# Altium PCB CompressorPCB.PcbDoc
Units mil, origin at the board's own origin, x right, y up, seen from the top; angles counter-clockwise.
Board outline 925.2 x 4665.35 mil, 2 copper layers (Top Layer, Bottom Layer); 60 components, 42 nets, 185 pads, 41 vias.
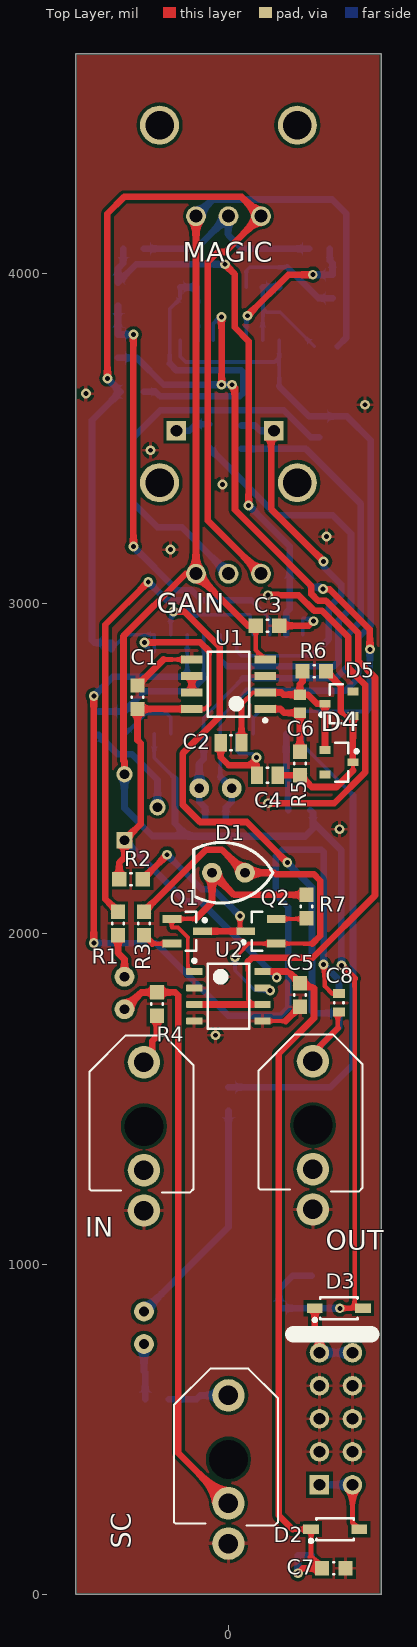
[diagram p0: Top Layer view]
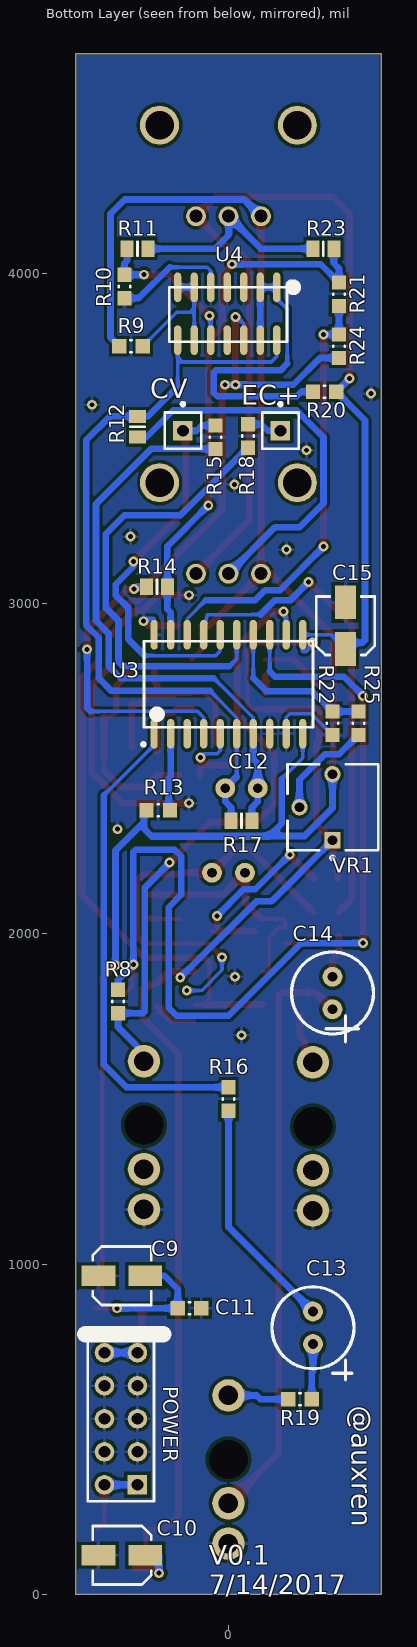
[diagram p1: Bottom Layer view, seen from below]

## Layer stack, top to bottom
Top Solder: solder mask 0.4, Solder Resist, Dk 3.5
Top Layer: signal copper 1.4
Dielectric 1: dielectric 12.6, FR-4, Dk 4.8
Bottom Layer: signal copper 1.4
Bottom Solder: solder mask 0.4, Solder Resist, Dk 3.5

## Board outline
-462.6,0 -462.6,4665.35 462.6,4665.35 462.6,0

## Design rules (kind name [scope] priority, off if disabled: settings)
BoardOutlineClearance [All] p1: gap=5 ignorepadtopadclearanceinfootprint=FALSE
Clearance [All] p1: gap=10 ignorepadtopadclearanceinfootprint=FALSE except(0: Arc-Hole Track-Hole SMDPad-Hole THPad-Hole Via-Hole Fill-Hole Poly-Hole Region-Hole Text-Hole)
PlaneConnect [All] p1: planeconnectstyle=Relief reliefexpansion=20 reliefentries=4 reliefconductorwidth=10 reliefairgap=20
PolygonConnect [All] p1: connectstyle=Relief reliefconductorwidth=10 reliefentries=4 polygonreliefangle="90 Angle" airgapwidth=10
RoutingVias [All] p1: holewidth=15 width=30 viastyle="Through Hole" minholewidth=15 minwidth=30 maxholewidth=28 maxwidth=50
SMDNeckDown [All] p1: percent=50.000
SolderMaskExpansion [All] p1: expansion=4
Width [All] p1: maxlimit=50 minlimit=10 preferedwidth=20
29 further rules are at their usual default settings.

## Components (designator, comment, footprint, x,y, rotation, side; value= is the part's Value field where it differs from the comment)
C1 "100nF" CAPC0603(1608)100_M -275.59,2716.54 r90 top
C2 "1uF" CAPC0805(2012)155_L 7.87,2578.74 r0 top
C3 "100nF" CAPC0603(1608)100_M 118.11,2933.07 r0 top
C4 "10uF" CAPC0805(2012)155_L 118.11,2480.32 r0 top
C5 "100nF" CAPC0603(1608)100_M 216.54,1814.96 r270 top
C6 "47nF" 1608[0603] 216.54,2696.85 r90 top
C7 "100nF" CAPC0603(1608)100_M 318.9,78.74 r0 top
C8 "47pF" CAPC0603(1608)100_L 334.65,1791.34 r270 top
C9 "22uF" NIC-CAPA2-4X5.8_V 322.83,964.57 r180 bottom
C10 "22uF" NIC-CAPA2-4X5.8_V 322.83,118.11 r0 bottom
C11 "100nF" CAPC0603(1608)100_M 118.11,866.14 r0 bottom
C12 "100nF" "WIMA Poly Cap" -39.37,2440.94 r0 bottom
C13 "47uF Bi-Polar" "Nichicon Bi-Polar 6.3mm" -255.91,807.09 r270 bottom value=47uF
C14 "47uF Bi-Polar" "Nichicon Bi-Polar 6.3mm" -314.96,1820.87 r270 bottom value=47uF
C15 "22uF" NIC-CAPA2-4X5.8_V -354.33,2933.07 r90 bottom
CV "Socket" PIN1 137.8,3523.62 r180 bottom
D1 "Red/Green LED" "Red/Green LED" 0,2185.04 r0 top
D2 "1N5819HW-7-F" DIOD-SOD-123-2_V 322.83,196.85 r180 top
D3 "1N5819HW-7-F" DIOD-SOD-123-2_V 334.65,866.14 r180 top
D4 "MBD101" SOT23_L 334.65,2519.69 r0 top
D5 "MBD101" SOT23_L 334.65,2696.85 r180 top
EC+ "Socket" PIN1 -157.48,3523.62 r180 bottom
GAIN "10k" SonGueiPot 0,3366.14 r0 top
IN "Thonkicon jack" "Thonkiconn Pot PJ301M" -255.91,1417.32 r0 top
MAGIC "100k" SonGueiPot 0,4448.82 r0 top
OUT "Thonkicon jack" "Thonkiconn Pot PJ301M" 255.91,1420.47 r0 top
POWER "Header 5X2" HDR2X5 275.59,331.5 r90 bottom (schematic designator P1)
Q1 "MMBT3906LT1G" SOT23_M -125,2007.87 r0 top
Q2 "MMBT3906LT1G" SOT23_M 98.43,2007.87 r180 top
R1 "20k" RESC0603(1608)_M -334.65,2031.5 r270 top
R2 "4.7k" RESC0603(1608)_M -295.28,2165.35 r0 top
R3 "10k" RESC0603(1608)_M -255.91,2031.5 r90 top
R4 "100k" RESC0603(1608)_M -216.54,1787.4 r270 top
R5 "200" RESC0603(1608)_M 216.54,2515.75 r90 top
R6 "2M" RESC0603(1608)_M 259.84,2795.28 r180 top
R7 "10k" RESC0603(1608)_M 236.22,2082.68 r90 top
R8 "20k" RESC0603(1608)_M 334.65,1795.28 r90 bottom
R9 "1.6M" RESC0603(1608)_M 295.28,3779.53 r180 bottom
R10 "12k" RESC0603(1608)_M 314.96,3960.63 r90 bottom
R11 "806k" 6-0805_L 275.59,4074.8 r0 bottom
R12 "806k" 6-0805_L 275.59,3535.43 r90 bottom
R13 "2M" RESC0603(1608)_M 212.76,2374.17 r180 bottom
R14 "6.04k" 6-0805_L 216.54,3051.18 r0 bottom
R15 "0" RESC0603(1608)_M 39.37,3503.94 r270 bottom
R16 "28k" RESC0603(1608)_M 0,1500 r90 bottom
R17 "6.04k" 6-0805_L -39.37,2342.52 r0 bottom
R18 "100k" RESC0603(1608)_M -59.06,3507.87 r270 bottom
R19 "100k" RESC0603(1608)_M -216.54,590.55 r0 bottom
R20 "1.6M" RESC0603(1608)_M -291.34,3641.73 r180 bottom
R21 "806k" 6-0805_L -287.4,4074.8 r0 bottom
R22 "51" RESC0603(1608)_M -314.96,2637.8 r270 bottom
R23 "12k" RESC0603(1608)_M -334.65,3937.01 r90 bottom
R24 "12k" RESC0603(1608)_M -334.65,3779.53 r90 bottom
R25 "300k" RESC0603(1608)_M -393.7,2637.8 r270 bottom
SC "Thonkicon jack" "Thonkiconn Pot PJ301M" 0,408.66 r0 top
U1 "LF353M" D0008A_M 0,2755.91 r180 top
U2 "LM393DR" D0008A_L 0,1811.02 r0 top
U3 "THAT4301" SOIC20THAT 0,2755.91 r90 bottom
U4 "THAT340 Transistor Array" SOIC14 78.74,3877.95 r270 bottom
VR1 "50k Trim" BOUR-3362P -316.34,2383.46 r90 bottom

## Footprints (in the part's own frame and the unit in brackets; to place one, negate y for a bottom-side part, rotate by r counter-clockwise, add the part's x,y. Pads: shape width x height; smd on the part's side, far side on the other; paste and mask are expansions set on the pad)
6-0805_L [mm] "Chip Resistor, Body 2.0x1.2mm, IPC High Density"
  rect 1x1.3 smd: 1(-0.8,0) 2(0.8,0)
  silkscreen extent 0,-0.55 0,0.55, body extent -1.07,-0.7 1.07,0.7, height 0.7
1608[0603] [mm] "Chip Capacitor, Body 1.6x0.8mm, IPC High Density"
  rect 0.8x0.9 smd: 1(-0.7,0) 2(0.7,0)
  body extent -0.87,-0.48 0.87,0.48, height 1.3
BOUR-3362P [mm] "THD, 3-Leads, Body 6.6x6.99mm, Pitch 2.54mm"
  rect 1.25x1.25 hole 0.75: 1(-2.54,0.035)
  round 1.25 hole 0.75: 2(0,2.575) 3(2.54,0.035)
  silkscreen extent -4.02,-3.5 3.3,3.5, body extent -3.3,-3.49 3.3,3.49, height 4.95
CAPC0603(1608)100_L [mm] "Chip Capacitor, Body 1.6x0.8mm, Height 1.0mm, IPC High Density"
  rect 0.7x0.9 smd: 1(-0.7,0) 2(0.7,0)
  silkscreen extent -0.05,-0.35 0.05,0.35, body extent -0.87,-0.47 0.88,0.48, height 1
CAPC0603(1608)100_M [mm] "Chip Capacitor, Body 1.6x0.8mm, Height 1.0mm, IPC Low Density"
  rect 1.1x1.1 smd: 1(-0.9,0) 2(0.9,0)
  silkscreen extent -0.05,-0.45 0.05,0.45, body extent -0.87,-0.47 0.88,0.48, height 1
CAPC0805(2012)155_L [mm] "Chip Capacitor, Body 2.0x1.2mm, Height 1.55mm, IPC High Density"
  rect 0.95x1.35 smd: 1(-0.8,0) 2(0.8,0)
  silkscreen extent -0.05,-0.57 0.05,0.57, body extent -1.1,-0.72 1.1,0.72, height 1.55
D0008A_L [mm] "SOIC, 8-Leads, Body 5x4mm, Pitch 1.27mm, IPC High Density"
  rrect18% 1.25x0.55 smd: 1(-2.625,1.905) 2(-2.625,0.635) 3(-2.625,-0.635) 4(-2.625,-1.905) 5(2.625,-1.905) 6(2.625,-0.635) 7(2.625,0.635) 8(2.625,1.905)
  silkscreen extent -2.75,-2.5 1.6,2.85, body extent -3,-2.45 3,2.45, height 1.63
D0008A_M [mm] "SOIC, 8-Leads, Body 5x4mm, Pitch 1.27mm, IPC Low Density"
  rrect15% 1.65x0.65 smd: 1(-2.825,1.905) 2(-2.825,0.635) 3(-2.825,-0.635) 4(-2.825,-1.905) 5(2.825,-1.905) 6(2.825,-0.635) 7(2.825,0.635) 8(2.825,1.905)
  silkscreen extent -2.95,-2.5 1.6,2.9, body extent -3,-2.45 3,2.45, height 1.63
DIOD-SOD-123-2_V [mm] "SOD-123, 2-Leads, Body 2.85x1.7mm (max), Pitch 3.7mm"
  rect 1.2x0.7 smd: 1(-1.85,0) 2(1.85,0)
  silkscreen extent -1.43,-0.85 1.97,1.02, body extent -1.42,-0.85 1.43,0.85, height 1.45
HDR2X5 [mm] "Connector; Header; 5x2 Position"
  rect 1.5x1.5 hole 0.9: 1(0,0)
  round 1.5 hole 0.9: 2(0,2.54) 3(2.54,0) 4(2.54,2.54) 5(5.08,0) 6(5.08,2.54) 7(7.62,0) 8(7.62,2.54) 9(10.16,0) 10(10.16,2.54)
  silkscreen extent -1.27,-1.27 11.43,3.81
NIC-CAPA2-4X5.8_V [mm] "Aluminum Electrolytic Capacitor, Diameter 4mm, Height 6.1mm, Pitch 3.6mm"
  rect 2.6x1.6 smd: 1(-1.8,0) 2(1.8,0)
  silkscreen extent -2.25,-2.25 2.25,2.25, body extent -2,-2 2,2, height 6.1
"Nichicon Bi-Polar 6.3mm" [mil]
  round 60 hole 30: 1(-49.21,0) 2(49.21,0)
  silkscreen extent -124,-124 124,124, body extent -124,-124 124,124, height 433
PIN1 [mm] "Connector; Plug"
  rect 1.5x1.5 hole 0.9: 1(0,0)
  silkscreen extent -1.4,-1.4 1.4,2.17
"Red/Green LED" [mil]
  round 60 hole 30: 1(-50,0) 2(50,0)
  silkscreen extent -105,-92 135,92
RESC0603(1608)_M [mm] "Chip Resistor, Body 1.6x0.8mm, IPC Low Density"
  rect 1.1x1.1 smd: 1(-0.9,0) 2(0.9,0)
  silkscreen extent -0.05,-0.45 0.05,0.45, body extent -0.85,-0.47 0.85,0.47, height 0.6
SOIC14 [mil]
  oval 90x21.65 smd: 1(-80,225) 2(-80,175) 3(-80,125) 4(-80,75) 5(-80,25) 6(-80,-25) 7(-80,-75) 8(80,-75) 9(80,-25) 10(80,25) 11(80,75) 12(80,125) 13(80,175) 14(80,225)
  silkscreen extent -99,-100 85,287, body extent -80,-100 80,255, height 104
SOIC20THAT [mil]
  oval 90x21.65 smd: 1(-150,225) 2(-150,175) 3(-150,125) 4(-150,75) 5(-150,25) 6(-150,-25) 7(-150,-75) 8(-150,-125) 9(-150,-175) 10(-150,-225) 11(150,-225) 12(150,-175) 13(150,-125) 14(150,-75) 15(150,-25) 16(150,25) 17(150,75) 18(150,125) 19(150,175) 20(150,225)
  silkscreen extent -187,-256 130,262, body extent -150,-255 150,255, height 104
SonGueiPot [mm]
  round 3 hole 2.2: 0(-5.3,0) 0(5.3,0)
  round 1.524 hole 1: 1(-2.5,-7) 2(0,-7) 3(2.5,-7)
  body extent -4.88,-7.23 4.88,5.32, height 20
SOT23_L [mm] "SOT23, 3-Leads, Body 2.9x1.3mm, Pitch 0.95mm, Lead Span 2.3mm - Reverse Pinning, IPC High Density"
  rect 0.85x0.6 smd: 1(1.075,0) 2(-1.075,-0.95) 3(-1.075,0.95)
  silkscreen extent -0.3,-1.5 1.48,1.5, body extent -0.7,-1.5 0.7,1.5, height 1.1
SOT23_M [mm] "SOT23, 3-Leads, Body 2.9x1.3mm, Pitch 0.95mm, Lead Span 2.3mm - Reverse Pinning, IPC Low Density"
  rect 1.45x0.6 smd: 1(1.175,0) 2(-1.175,-0.95) 3(-1.175,0.95)
  silkscreen extent -0.1,-1.5 1.48,1.5, body extent -0.7,-1.5 0.7,1.5, height 1.1
"Thonkiconn Pot PJ301M" [mm] "PJ301 Thonkicon Jack from Thonk"
  round 1.524 hole 3: 0(0,0)
  round 2.5 hole 1.5: 1(0,-6.48) 2(0,-3.38) 3(0,4.92)
  silkscreen extent -4.19,-5.08 3.81,6.99, body extent -4.55,-10.29 4.44,5.71, height 14
"WIMA Poly Cap" [mil]
  round 60 hole 30: 1(-49.21,0) 2(49.21,0)
  body extent -100,-50 95,50, height 295

## Part data
C1 C3 C5 C7 C11: library part CMP-1035-00002-1, "CAP", Mfr=AVX, Mfr_Pn=MM035C104KCZ2A, Distributor=Mouser, Distributor_Pn=581-MM035C104KCZ2A
C2: library part CMP-1036-04882-1, "CAP 4.7uF 10V ±10% 0805 (2012 Metric) Thickness 1.55mm SMD", Case-EIA=0805, Case-Metric=2012, Mfr=Murata, Mfr_Pn=GCJ21BL81E105KA1L, Rated Voltage="10 V", Tolerance=±10%, Distributor=Mouser, Distributor_Pn=81-GCJ21BL81E105KA1L, Max Thickness="1.55 mm", Technology=SMT
C4: library part CMP-1036-04882-1, "CAP 4.7uF 10V ±10% 0805 (2012 Metric) Thickness 1.55mm SMD", Case-EIA=0805, Case-Metric=2012, Mfr=Murata, Mfr_Pn=GRM21BC71E106KE11L, Rated Voltage="10 V", Tolerance=±10%, Distributor=Mouser, Distributor_Pn=81-GRM21BC71E106KE1L, Max Thickness="1.55 mm", Technology=SMT
C6: library part CMP-1037-05002-1, "CAP 47uF 10V ±20% 1206 (3216 Metric) Thickness 1.9mm SMD", Case-EIA=1206, Case-Metric=3216, Mfr=Murata, Mfr_Pn=GRM188R71H473KA61D, Rated Voltage="10 V", Tolerance=±20%, Distributor=Mouser, Distributor_Pn=81-GRM188R71H473KA61, Max Thickness="1.9 mm", Technology=SMT
C8: library part CMP-1035-00351-1, "CAP 5.1pF 25V ±0.5pF 0603 (1608 Metric) Thickness 1mm SMD", Case-EIA=0603, Case-Metric=1608, Mfr=Yageo, Mfr_Pn=C0603FRNPO9BN470, Rated Voltage="25 V", Tolerance=±0.5pF, Distributor=Mouser, Distributor_Pn=603-C0603FRNPO9BN470, Max Thickness="1 mm", Technology=SMT, Type=NPO
C9 C10 C15: library part CMP-0687-00016-1, "Aluminum Electrolytic Capacitor, UD Series, Low Impedance, 10 uF, 25 V, + / - 20%, -55 to 105 degC, Chip Type, 4 x 5.8 mm D x L, Pb-Free, Reel", Mfr=Kemet, Mfr_Pn=EDH106M025S9BAA, Distributor=Mouser, Distributor_Pn=80-EDH106M025S9BAA
C12: library part CMP-1037-05002-1, "CAP 47uF 10V ±20% 1206 (3216 Metric) Thickness 1.9mm SMD", Case-EIA=1206, Case-Metric=3216, Mfr=WIMA, Mfr_Pn=MKS0C031000C00KSSD, Rated Voltage="10 V", Tolerance=±20%, Distributor=Mouser, Distributor_Pn=505-MKS02.1/63/10, Max Thickness="1.9 mm", Technology=SMT, Type=Poly
C13 C14: library part CMP-1037-05002-1, "CAP 47uF 10V ±20% 1206 (3216 Metric) Thickness 1.9mm SMD", Case-EIA=1206, Case-Metric=3216, Mfr=Nichicon, Mfr_Pn=UEP1E470MED, Rated Voltage="10 V", Tolerance=±20%, Distributor=Mouser, Distributor_Pn=647-UEP1E470MED, Max Thickness="1.9 mm", Technology=SMT
D1: Mfr=Lumex, Mfr_Pn=SSL-LX3044IGW, Distributor=Mouser, Distributor_Pn=696-SSL-LX3044IGW, Size=3mm
D2 D3: library part CMP-0303-00003-1, "1.0 A Surface Mount Schottky Barrier Rectifier, 40 V, -65 to 125 degC, 2-Pin SOD-123 Package, RoHS, Tape and Reel", Mfr="Diodes Inc.", Distributor=Mouser, Distributor_Pn=621-1N5819HW-F, Mfr_Pn=1N5819HW-7-F
GAIN MAGIC: library part CMP-0972-00009-1, "Trimming Potentiometer, 5K Ohm +/- 10%, -55 to 125 degC, 3-Pin 19.05 x 4.83 x 6.6 mm THD, Transparent Housing, RoHS", Manufacturer=Bourns, PartNumber=3006P-7-502ZLF, Resistance (kOhm)=5, Resistance Tolerance="+/- 10%", Temperature Range="-55 to 125 degC", ComponentLink1Description="Manufacturer URL", ComponentLink1URL=http://www.bourns.com/, ComponentLink2Description=Datasheet, ComponentLink2URL=http://www.bourns.com/data/global/pdfs/3006.pdf, ComponentLink3Description="Package Specification", ComponentLink3URL=http://www.bourns.com/data/global/pdfs/3006.pdf, DatasheetVersion=Apr-14, Distributor=Mouser, Mounting Technology="Through Hole", Number of Turns=15, PackageDescription="3-Pin THD, Body 19.05 x 4.83 mm, Height 6.6 mm", PackageReference=3006P-3, PackageVersion=Apr-14, RoHS=TRUE, Rotational Life="200 Cycles"
POWER: "Header, 5-Pin, Dual row", Distributor_Pn=855-M20-9980545, LatestRevisionDate=17-Jul-2002, LatestRevisionNote="Re-released for DXP Platform.", Publisher="Altium Limited"
Q1 Q2: library part 2N3906, "PNP General Purpose Amplifier", Mfr="On Semi", ComponentLink1Description="Manufacturer Link", ComponentLink1URL=http://www.fairchildsemi.com/, ComponentLink2Description=Datasheet, ComponentLink2URL=http://www.fairchildsemi.com/ds/2N%2F2N3906.pdf, DatasheetVersion=1997, Distributor=Mouser, Distributor_Pn=863-MMBT3906LT1G, LatestRevisionDate=15-Jan-2003, LatestRevisionNote="PCB Footprint 'BCY-W3/D4.7' replaced", Mfr_Pn=MMBT3906LT1G, PackageDescription="TO, Flat Index; 3 In-Line, Axial Leads; Body Dia. 4.5mm; Leads 0.51 x 0.48 mm (max)", PackageReference=TO-92A, PackageVersion=Sep-1998, Published=8-Jun-2000, Publisher="Altium Limited"
R1 R8: library part CMP-1012-00002-1, "Res", Case-EIA=0603, Mfr=Yageo, Mfr_Pn=RT0603FRE0720KL, Tolerance=1%, Distributor=Mouser, Distributor_Pn=603-RT0603FRE0720KL
R2: library part CMP-1012-00002-1, "Res", Case-EIA=0603, Mfr=Susumu, Mfr_Pn=RR0816P-104-D, Tolerance="5 %", Distributor=Mouser
R3 R7: library part CMP-1012-00002-1, "Res", Case-EIA=0603, Mfr=Yageo, Mfr_Pn=RT0603FRE0710KL, Tolerance="5 %", Distributor=Mouser, Distributor_Pn=603-RT0603FRE0710KL
R4 R18 R19: library part CMP-1012-00002-1, "Thin Film Resistor", Case-EIA=0603, Mfr=Yageo, Mfr_Pn=RT0603FRE07100KL, Tolerance="1 %", Distributor=Mouser, Distributor_Pn=603-RT0603FRE07100KL
R5: library part CMP-1012-00002-1, "Res", Case-EIA=0603, Mfr=Yageo, Mfr_Pn=RT0603DRE07200RL, Tolerance="5 %", Distributor=Mouser, Distributor_Pn=603-RT0603DRE07200RL
R6 R13: library part CMP-1012-00002-1, "Res", Case-EIA=0603, Mfr=Yageo, Mfr_Pn=RC0402FR-072ML, Tolerance="5 %", Distributor=Mouser, Distributor_Pn=603-RC0402FR-072ML
R9 R20: library part CMP-1012-00002-1, "Res", Case-EIA=0603, Mfr=Yageo, Mfr_Pn=RC0603FR-071M6L, Tolerance="5 %", Distributor=Mouser, Distributor_Pn=603-RC0603FR-071M6L
R10 R23 R24: library part CMP-1012-00002-1, "Res", Case-EIA=0603, Mfr=Yageo, Mfr_Pn=RT0603FRE0712KL, Tolerance="5 %", Distributor=Mouser, Distributor_Pn=603-RT0603FRE0712KL
R11 R12 R21: library part CMP-1012-00002-1, "Res", Case-EIA=0603, Mfr=Yageo, Mfr_Pn=RT1206FRE07806KL, Tolerance="5 %", Distributor=Mouser, Distributor_Pn=603-RT1206FRE07806KL
R14 R17: library part CMP-1012-00002-1, "Res", Case-EIA=0603, Mfr="TE Connectivity", Mfr_Pn=RN73C2A6K04BTDF, Temp Cpef=3300ppm, Tolerance="5 %", Distributor=Mouser, Distributor_Pn=279-RN73CA-6.04K
R15: library part CMP-1012-00002-1, "Res", Case-EIA=0603, Mfr=Vishay, Mfr_Pn=MCT06030Z0000ZP500, Tolerance="5 %", Distributor=Mouser, Distributor_Pn=594-MCT06030Z0000ZP5
R16: library part CMP-1012-00002-1, "Res", Case-EIA=0603, Mfr=Yageo, Mfr_Pn=RT0402BRD0728KL, Tolerance=.1%, Distributor=Mouser, Distributor_Pn=603-RT0402BRD0728KL
R22: library part CMP-1012-00002-1, "Res", Case-EIA=0603, Mfr=Yageo, Mfr_Pn=RT0603BRD0751RL, Tolerance="5 %", Distributor=Mouser, Distributor_Pn=603-RT0603BRD0751RL
R25: library part CMP-1012-00002-1, "Res", Case-EIA=0603, Mfr=Yageo, Mfr_Pn=RT0603DRD07300KL, Tolerance="5 %", Distributor=Mouser, Distributor_Pn=603-RT0603DRD07300KL
U1: library part CMP-0055-00855-3, "Wide Bandwidth Dual JFET Input Operational Amplifier, 8-pin Narrow SOIC", Manufacturer="Texas Instruments", Mfr_Pn=LF353MX/NOPB, Package Reference=D0008A, PackageTopMarking=NSZXTT*LF353*M, PowerWise=N, Code_IPC=SOIC127P600-8, Code_JEDEC=MS-012-AA, ComponentLink1Description="Datasheet URL", ComponentLink1URL=http://www.ti.com/general/docs/lit/getliterature.tsp?genericPartNumber=LF353-N&fileType=pdf, CompType=Amplifiers, Distributor=Mouser, Mfr="Texas Instruments", PackageDescription="SOIC Narrow, 4.9 x 3.9 x 1.45mm, 8 Lead, 1.27mm Pitch", PinCount=8, RoHS=N
U2: library part CMP-0055-00682-3, "Low Power Low Offset Voltage Dual Comparator, 8-pin Narrow SOIC", Manufacturer="Texas Instruments", Package Reference=D0008A, PackageTopMarking=NSZXTT*LM*393M, PowerWise=N, Code_IPC=SOIC127P600-8, Code_JEDEC=MS-012-AA, ComponentLink1Description="Datasheet URL", ComponentLink1URL=http://www.ti.com/general/docs/lit/getliterature.tsp?genericPartNumber=LM393-N&fileType=pdf, CompType=Amplifiers, Distributor=Mouser, Distributor_Pn=595-LM393DR, Mfr="Texas Instruments", Mfr_Pn=LM393DR, PackageDescription="SOIC Narrow, 4.9 x 3.9 x 1.45mm, 8 Lead, 1.27mm Pitch", PinCount=8, RoHS=N
U3: Mfr="THAT Corp", Mfr_Pn=4301W20-U, Distributor=Mouser, Distributor_Pn=887-4301W20-U
U4: library part THAT340, Mfr="THAT Corp", Mfr_Pn=340S14-U, Distributor=Mouser, Distributor_Pn=887-340S14-U
VR1: library part CMP-1747-00004-1, "Square Trimpot(R) Trimming Potentiometer, 10 KOhm, 300 V, -55 to 125 degC, 3-Pin THD, RoHS, Tube", Case/Package=1206, Case Code (Imperial)=0612, Case Code (Metric)=1632, Max Operating Temperature=125degC, Mfr=Bourns, Mfr_Pn=3362P-1-503LF, Min Operating Temperature=-25degC, Package Quantity=5000, Power Rating="1 W", Resistance="50 mohm", Tolerance=1%, Voltage Rating="220 mV", ComponentLink1Description="Manufacturer URL", ComponentLink1URL=http://www.bourns.com/, ComponentLink2Description=Datasheet, ComponentLink2URL=http://www.bourns.com/docs/Product-Datasheets/3362.pdf, DatasheetVersion=May-16, Distributor=Mouser, Distributor_Pn=652-3362P-1-503LF, Height="0.6 mm", Length="3.2 mm", Mount="Surface Mount", PackageDescription="3-Pin Through Hole Device, Body 6.6 x 6.99 mm, Pitch 2.54 mm", PackageReference=3326P, Packaging="Tape and Reel", Pins=2, REACH SVHC="No SVHC", RoHSCompliant=True, Width="1.6 mm"
CV EC+: Distributor=Mouser, LatestRevisionDate=17-Jul-2002, LatestRevisionNote="Re-released for DXP Platform.", Publisher="Altium Limited"
D4 D5 IN OUT SC: Distributor=Mouser

## Via types
v1: diameter 30, hole 15, Top Layer to Bottom Layer, tented both sides, 41 vias

## Nets (pads, with @x,y where several pads share a name; then routed paths per layer and width w, separated by ;. In a path a pad name is that pad's centre, name@x,y a point inside that pad or via, vN(x,y) a via of type N, cw(c..) or ccw(c..) an arc to the next point about the centre after c; other vN are vias at no path point)
+12V: C1.1 C5.1 C7.1 C10.1 C15.1 D2.2 GAIN.3 MAGIC.3 R2.1 R20.2 U1.8 U2.8 U3.11 VR1.1 | length 7437.5
  Top Layer w12.8: U1.8 -71.8,2680.91 -57.91,2694.8 -57.91,2854.8
  Top Layer w13.78: 194.09,196.85 D2.2 250,112.21
  Top Layer w20: v1(-366.91,3681.87) -366.91,4180.8 -315.91,4231.8 39.85,4231.8 MAGIC.3 -10,4064.8 -32.56,4064.8 -62.56,4034.8 -62.56,3251.54 GAIN.3 ; R2.1 -330.71,2215.8 -314.96,2231.55 VR1.1 -265.91,2332.52 -265.91,2577.12 -275.59,2586.8 C1.1 -193.91,2681.1 -193.71,2680.91 U1.8 ; v1(-254.81,2882.8) -85.91,2882.8 -57.91,2854.8 ; U2.8 146.09,1886.02 ; v1(146.09,1867.8) 146.09,1886.02 ; 194.09,196.85 152.09,238.85 152.09,1637.8 259.09,1744.8 259.09,1835.39 C5.1 180.9,1886.02 146.09,1886.02 ; v1(210.09,63.8) 225.03,78.74 C7.1 250,112.21
  Bottom Layer w10.83: C15.1 -310.63,2905.91 U3.11 -225,2854.71 -234.72,2854.71 -254.81,2874.8 v1(-254.81,2882.8)
  Bottom Layer w20: v1(-366.91,3681.87) R20.2 -413.39,3555.12 -413.39,2889.28 -405.91,2881.8 -354.33,2881.8 C15.1 ; VR1.1 -129.95,2098.46 -84.56,2098.46 v1(146.09,1867.8) ; v1(210.09,63.8) 210.09,118.11 C10.1
-12V: C3.1 C9.2 C11.2 D3.1 GAIN.1 MAGIC.1 R9.1 R13.1 U1.4 U3.10 VR1.3 | length 6504.8
  Top Layer w12.8: C3.1 82.68,2859.45 U1.4
  Top Layer w13.78: v1(337.09,866.14) 382.09,866.14 ; 382.09,1864.8 382.09,866.14 ; D3.1 382.09,866.14
  Top Layer w20: VR1.3 -314.96,2521.86 -317.91,2524.8 -317.91,2901.8 -129.16,3090.55 GAIN.1 ; MAGIC.1 GAIN.1 ; C3.1 59.05,2933.07 GAIN.1 ; v1(342.09,1904.8) 382.09,1864.8
  Bottom Layer w10.83: U3.10 -225,2532.8 -161.91,2469.71
  Bottom Layer w20: VR1.3 -314.96,2380.86 -230.55,2296.45 -123.55,2296.45 ; -161.91,2469.71 -161.91,2334.8 -123.55,2296.45 ; MAGIC.1 -47.85,4223.8 314.09,4223.8 357.09,4180.8 357.09,3805.91 R9.1 ; R13.1 255.91,2366.46 255.91,2338.58 ; C9.2 194.09,964.57 153.54,924.02 C11.2 v1(337.09,866.14) ; v1(342.09,1904.8) 342.09,2252.39 255.91,2338.58 ; -123.55,2296.45 -121.91,2294.8 231.97,2294.8 233.61,2296.45 ; -123.55,2296.45 233.61,2296.45 ; 233.61,2296.45 255.91,2318.74 255.91,2338.58
GND: C1.2 C3.2 C5.2 C7.2 C9.1 C10.2 C11.1 C15.2 IN.1 OUT.1 POWER.3 POWER.4 POWER.5 POWER.6 POWER.7 POWER.8 R10.1 R22.2 SC.1 U1.3 U1.5 U2.2 U2.4 U2.5 U3.8 U3.9 U3.20 U4.3 U4.4 U4.5 | length 2157.7
  Top Layer w10.83: U2.5 173.03,1736.02
  Top Layer w12.8: -196.66,2830.91 U1.5
  Top Layer w20: C1.2 -196.66,2830.91 ; v1(119.3,2395.62) 320.34,2395.62 413.7,2488.98 413.7,2754.35 363.09,2804.95 363.09,2898.38 282.67,2978.8 259.17,2978.8 212.43,3025.54 v1(119.3,3025.54) ; C3.2 243.36,2933.07 v1(257.09,2946.8) ; 173.03,1736.02 C5.2
  Bottom Layer w10.83: R22.2 -250.52,2666.8 -185.91,2666.8 -175,2655.9 U3.9 ; U4.5 53.74,4008.45 64.09,4018.8 178.09,4018.8 ; U3.20 225,2954.8 249.09,2954.8 v1(257.09,2946.8)
  Bottom Layer w20: 178.09,4018.8 271.7,3925.2 R10.1
  other v1: -39.37,1692.91 -19.69,1870.08 335.83,2316.88 -175.98,3163.34 296.46,3202.71 -18.5,3360.19 -236.22,3464.57 413.39,3602.36 -431.88,3635.78
NetC2_1: C2.1 C4.1 U3.5 | length 360.5
  Top Layer w18.7: C2.1 -23.62,2534.8 0.38,2510.8 86.61,2510.8 ; v1(85.09,2533.8) 66.93,2515.64 79.85,2512.46 86.61,2510.8 ; C4.1 86.61,2510.8
  Bottom Layer w10.83: U3.5 25,2554.8 35,2544.8 74.09,2544.8 v1(85.09,2533.8)
NetC2_2: C2.2 C6.2 D4.3 D5.1 R6.2 U1.2 | length 602.9
  Top Layer w12.8: 39.37,2696.18 74.09,2730.91 U1.2
  Top Layer w18.7: C2.2 39.37,2696.18
  Top Layer w20: U1.2 160.09,2730.91 166.59,2724.41 C6.2 ; R6.2 224.41,2763.68 216.53,2755.8 C6.2 ; D4.3@292.31,2566.93 292.31,2631.8 ; 292.32,2631.82 D5.1 267.65,2696.85 240.09,2724.41 C6.2
NetC4_2: C4.2 D4.1 D5.3 R5.1 R6.1 | length 618.6
  Top Layer w11.81: 340.09,2673.45 354.09,2659.45 D5.3 ; D4.1@376.95,2529.53 377.09,2529.53 377.09,2494.8
  Top Layer w20: C4.2@157.48,2480.32 C4.2 R5.1 252.05,2444.8 327.09,2444.8 377.09,2494.8 ; R6.1 340.09,2750.46 340.09,2673.45 ; D4.1@376.95,2529.53 376.95,2593.8 D5.3
NetC6_1: C6.1 R5.2 U1.1 | length 228.2
  Top Layer w20: U1.1 157.09,2680.91 168.71,2669.29 C6.1 R5.2
NetC8_1: C8.1 R8.2 U3.13 | length 3050.2
  Top Layer w13.78: v1(288.09,1906.8) 291.09,1903.8 291.09,1841.9 314.09,1818.9 C8.1
  Top Layer w20: v1(-407.91,1971.8) v1(-407.91,2720.8)
  Bottom Layer w10.83: -125,2794.8 U3.13
  Bottom Layer w20: v1(-407.91,1971.8) -219.83,1971.8 -19.69,1771.65 0,1751.97 157.48,1751.97 181.09,1775.58 181.09,2080.8 143.09,2118.8 143.09,2234.8 163.09,2254.8 281.09,2254.8 288.09,2247.8 v1(288.09,1906.8) 334.65,1860.25 R8.2 ; v1(-407.91,2720.8) -349.91,2778.8 -141,2778.8 -125,2794.8
NetC8_2: C8.2 OUT.3 R8.1 U3.12 | length 2119.5
  Top Layer w13.78: 331.09,1713.97 331.09,1763.78 C8.2
  Top Layer w20: v1(-166.41,2975.8) -133.91,2975.8 -25.91,2867.8 -25.91,2658.8 -138.91,2545.8 -138.91,2391.8 -85.91,2338.8 55.09,2338.8 v1(178.09,2215.8) ; OUT.3@231.3,1614.17 331.09,1713.97
  Bottom Layer w10.83: U3.12 -175,2967.21 v1(-166.41,2975.8)
  Bottom Layer w20: v1(178.09,2215.8) 253.09,2140.8 253.09,1765.8 259.05,1759.84 R8.1 334.65,1717.52 OUT.3@231.3,1614.17
NetC12_1: C12.1 R15.2 R17.1 U3.7 | length 1765.5
  Bottom Layer w10.83: U3.7 -75,2654.8 44,2773.8
  Bottom Layer w20: U3.7 -75,2529.39 -88.58,2515.8 C12.1 -88.58,2400.52 -70.87,2382.8 R17.1 ; R15.2 234.39,3468.5 401.09,3301.8 401.09,2948.04 363.09,2910.04 363.09,2810.8 326.09,2773.8 44,2773.8
NetC12_2: C12.2 R12.2 R17.2 U3.6 U4.8 U4.14 | length 2384.4
  Bottom Layer w10.83: U4.14 -146.26,3748.45 -129.61,3731.8 140.74,3731.8 153.74,3744.8 ; -25,2475.79 U3.6 -25,2654.8 56,2735.8 ; 153.74,3657.8 153.74,3744.8 ; U4.8 153.74,3744.8
  Bottom Layer w19.68: 153.74,3657.8 244.61,3566.93 R12.2 358.97,3566.93
  Bottom Layer w20: -25,2475.79 C12.2 9.84,2400.52 -7.87,2382.8 R17.2 ; 56,2735.8 354.09,2735.8 393.09,2774.8 393.09,2896.8 431.09,2934.8 431.09,3494.8 358.97,3566.93
NetC13_1: C13.1 R16.1 | length 714.3
  Bottom Layer w20: C13.1 0,1112.21 R16.1
NetC13_2: C13.2 R19.1 | length 169
  Bottom Layer w20: C13.2 -255.91,675.74 -251.97,671.8 R19.1
NetC14_1: C14.1 R1.2 | length 134.1
  Top Layer w20: R1.2 -334.65,1942.49 -314.96,1922.8 C14.1
NetC14_2: C14.2 R4.1 SC.2 | length 1789.1
  Top Layer w20: C14.2 -263.78,1822.84 R4.1 -160.91,1822.84 -151.91,1813.84 -151.91,427.5 SC.2
NetCV_1: CV.1 R15.1 U3.16 | length 1202.3
  Top Layer w20: CV.1 129.09,3523.62 129.09,3286.8 v1(288.09,3127.8)
  Bottom Layer w10.83: U3.16 25,2856.8 39,2842.8 254.09,2842.8
  Bottom Layer w20: R15.1 80.09,3539.37 95.84,3523.62 CV.1 ; 254.09,2842.8 303.09,2891.8 303.09,2986.8 341.09,3024.8 341.09,3058.8 288.09,3111.8 v1(288.09,3127.8)
NetD1_1: D1.1 Q1.3 R7.2 U2.1 | length 756.8
  Top Layer w10.83: -122.91,1988.8 -122.91,1886.02 U2.1
  Top Layer w11.81: -122.91,1988.8 -152.91,2018.8 -171.91,2018.8 -171.91,2045.28 Q1.3 -99.53,2045.28
  Top Layer w20: -99.53,2045.28 -50,2094.8 D1.1 16.93,2118.11 R7.2
NetD1_2: D1.2 Q2.3 R3.2 U2.7 | length 1274.2
  Top Layer w11.81: v1(19.68,1929.13) 61.02,1970.47 Q2.3 254.09,1970.47
  Top Layer w20: R3.2 -68.03,2254.8 -19.76,2254.8 D1.2 138.86,2185.04 143.09,2180.8 258.33,2180.8 278.09,2161.04 278.09,1994.47 254.09,1970.47
  Bottom Layer w10: v1(19.68,1929.13) 19.68,1889.76 81.02,1828.43 v1(126.41,1828.43)
NetD2_1: D2.1 POWER.1 POWER.2 | length 243
  Top Layer w13.78: POWER.2 375.59,216.93 D2.1
  Bottom Layer w20: POWER.1 POWER.2
NetD3_2: D3.2 POWER.9 POWER.10 | length 240.4
  Top Layer w20: D3.2 261.81,805.58 275.59,791.8 POWER.9
  Bottom Layer w20: POWER.9 POWER.10
NetEC+_1: EC+.1 R18.1 | length 106.6
  Bottom Layer w20: EC+.1 -118.91,3523.62 -99.22,3543.31 R18.1
NetGAIN_2: GAIN.2 R12.1 | length 1207.6
  Bottom Layer w19.68: 167.09,3585.8 248.96,3503.94 R12.1
  Bottom Layer w20: GAIN.2 -141.25,3231.8 -215.91,3231.8 -287.91,3303.8 -287.91,3503.8 -205.91,3585.8 167.09,3585.8
NetIN_3: IN.3 R4.2 | length 157.3
  Top Layer w20: IN.3 -231.3,1635.63 -231.3,1674.8 -216.54,1689.57 R4.2
NetMAGIC_2: MAGIC.2 R11.1 R21.2 | length 616.4
  Bottom Layer w19.68: R21.2 -98.43,4074.8 ; 41.09,4074.8 R11.1
  Bottom Layer w20: -98.43,4074.8 MAGIC.2@-0.91,4172.33 ; 41.09,4074.8 -0.91,4116.8 MAGIC.2@-0.91,4172.33 ; MAGIC.2@-0.91,4172.33 MAGIC.2 -0.91,4173.23 MAGIC.2@-0.91,4172.33
NetQ1_1: Q1.1 Q2.1 R2.2 | length 579.4
  Top Layer w11.81: v1(35.09,2053.8) 35.09,2007.88 Q2.1
  Top Layer w20: R2.2 v1(-185.65,2239.55) ; Q1.1 Q2.1@35.09,2007.88
  Bottom Layer w20: v1(-185.65,2239.55) -80.91,2134.8 -45.91,2134.8 v1(35.09,2053.8)
NetQ1_2: Q1.2 R3.1 | length 95.2
  Top Layer w11.81: -230.32,1970.47 Q1.2
  Top Layer w20: R3.1 -230.32,1970.47
NetQ2_2: Q2.2 R7.1 | length 92.4
  Top Layer w11.81: Q2.2 R7.1@234.25,2045.28
  Top Layer w20: R7.1@234.25,2045.28 R7.1
NetR1_1: R1.1 U3.17 | length 1478.4
  Top Layer w20: R1.1 -372.91,2105.19 -372.91,2935.8 v1(-242.91,3065.8)
  Bottom Layer w10.83: -96.91,2966.8 64,2966.8 U3.17
  Bottom Layer w20: v1(-242.91,3065.8) -187.91,3010.8 -140.91,3010.8 -96.91,2966.8
NetR9_2: R9.2 U4.6 U4.7 U4.9 | length 413.2
  Bottom Layer w10.83: U4.9 103.74,3893.16 ; U4.6 103.74,3893.16 ; R9.2 156.57,3882.8 114.09,3882.8 103.74,3893.16
  Bottom Layer w20: U4.6 U4.7
NetR10_2: R10.2 R11.2 U4.10 | length 466.6
  Top Layer w20: v1(57.13,3871.8) 181.39,3996.06 v1(255.35,3996.06)
  Bottom Layer w10.83: U4.10 53.74,3868.42 v1(57.13,3871.8)
  Bottom Layer w20: v1(255.35,3996.06) R10.2 314.96,4030.8 307.09,4038.68 R11.2
NetR13_2: R13.2 U3.2 | length 234.3
  Bottom Layer w20: U3.2 175,2476.91 181.1,2470.8 R13.2@181.1,2374.17
NetR14_1: R14.1 R21.1 R23.2 U3.19 | length 1662.8
  Top Layer w20: v1(-10.91,4027.8) 19.09,3997.8 19.09,3836.8 61.09,3794.8 v1(61.09,3297.7)
  Bottom Layer w19.68: R14.1 185.04,3173.75
  Bottom Layer w20: R21.1 -318.9,4030.55 -334.65,4014.8 R23.2 -279.28,4027.8 v1(-10.91,4027.8) ; v1(61.09,3297.7) 185.04,3173.75 ; U3.19 175,2972.8 185.04,2982.84 R14.1
NetR14_2: R14.2 U3.4 | length 885.1
  Top Layer w20: v1(286.09,3043.8) 306.09,3043.8 428.09,2921.8 v1(428.09,2861.8)
  Bottom Layer w10.83: U3.4 75,2654.8 94,2673.8 417.09,2673.8
  Bottom Layer w19.68: R14.2 278.72,3051.18 v1(286.09,3043.8)
  Bottom Layer w20: 417.09,2673.8 428.09,2684.8 v1(428.09,2861.8)
NetR16_2: R16.2 U3.1 | length 1470.5
  Bottom Layer w10.83: U3.1 225,2571.8 377.09,2419.71
  Bottom Layer w20: R16.2 308.72,1535.43 377.09,1603.8 377.09,2419.71
NetR18_2: R18.2 U3.15 | length 1388.2
  Bottom Layer w10.83: U3.15 -25,2831.9 -2.91,2809.8
  Bottom Layer w20: R18.2 145.67,3267.72 314.96,3267.72 371.09,3211.58 371.09,2986.8 333.09,2948.8 333.09,2824.8 318.09,2809.8 -2.91,2809.8
NetR19_2: R19.2 SC.3 | length 186
  Bottom Layer w20: R19.2 -96.91,590.55 -85.09,602.36 SC.3
NetR20_1: R20.1 U4.1 U4.2 U4.13 | length 1060.5
  Bottom Layer w10.83: -177.91,3726.8 -177.91,3892.16 -146.26,3923.8 U4.1
  Bottom Layer w20: R20.1 -220.84,3641.73 -206.91,3627.8 34.09,3627.8 45.09,3638.8 45.09,3699.39 38.09,3706.39 -157.49,3706.39 -177.91,3726.8 ; U4.1 U4.2 U4.13
NetR22_1: R22.1 R25.1 U3.14 | length 491.9
  Bottom Layer w10.83: -75,2774.8 U3.14
  Bottom Layer w20: R25.1 R22.1 -253.39,2734.8 -115,2734.8 -75,2774.8
NetR23_1: R23.1 R24.2 U3.18 | length 1327.4
  Top Layer w20: v1(-287.91,3172.8) v1(-287.91,3814.96)
  Bottom Layer w10.83: 68.61,3010.8 125,2954.41 U3.18
  Bottom Layer w20: R23.1 R24.2 v1(-287.91,3814.96) ; v1(-287.91,3172.8) -155.91,3040.8 -110.99,3040.8 -80.99,3010.8 68.61,3010.8
NetR24_1: R24.1 U2.3 U2.6 U4.12 | length 3217.7
  Top Layer w10.83: 58.09,1914.8 58.09,1802.02 74.09,1786.02 U2.6
  Top Layer w20: U2.3 74.09,1786.02 ; v1(-20.91,3662.8) v1(-20.91,3867.8) ; v1(10.09,3662.8) 19.68,3653.21 19.68,3284.21 251.09,3052.8 251.09,3029.31 271.6,3008.8 295.09,3008.8 393.09,2910.8 393.09,2826.8 443.7,2776.2 443.7,2116.41 255.09,1927.8 71.09,1927.8 58.09,1914.8
  Bottom Layer w10.83: U4.12 -46.26,3847.45 -25.91,3867.8 v1(-20.91,3867.8)
  Bottom Layer w20: R24.1 -277.43,3744.1 -196.14,3662.8 v1(-20.91,3662.8) v1(10.09,3662.8)
NetR25_2: R25.2 VR1.2 | length 318
  Bottom Layer w20: R25.2 -335.73,2544.39 -292.93,2544.39 -214.96,2466.42 VR1.2
NetU1_6: U1.6 U1.7 | length 50
  Top Layer w20: U1.7 U1.6
pads on no net: D4.2 D5.2 GAIN.0 IN.0 IN.2 MAGIC.0 OUT.0 OUT.2 SC.0 U3.3 U4.11

## Polygon pours and split planes (outlines as drawn)
GND on Top Layer "Drill Drawing-No Net" (solid, remove dead copper, pour order 4): -531.5,5059.06 -688.98,4901.57 -688.98,-413.39 767.72,-413.39 925.2,-255.91 748.03,-78.74 748.03,4862.2
GND on Bottom Layer "Drill Drawing-No Net" (solid, pour order 5): -551.18,5137.8 -551.18,-374.02 -590.55,-413.39 -551.18,-452.76 728.35,-452.76 728.35,5196.85 708.66,5216.54

## Silkscreen, mask and mechanical layers (free items; w line width, h text height)
Top Overlay:
  lines w50: 196.85,787.4 433.07,787.4
Bottom Overlay:
  lines w10: -393.7,1712.6 -295.28,1712.6 ; -374.02,669.29 -314.96,669.29 ; -354.33,649.61 -354.33,708.66 ; -354.33,1673.23 -354.33,1751.97
  lines w50: 196.85,787.4 433.07,787.4
  text "@auxren" at -374.02,570.87 h60 r90
  text "V0.1 / 7/14/2017" at 59.06,0 h60
Mechanical 1:
  the board outline again, w10
Mechanical 13:
  lines w10: -501.97,-196.85 498.03,-196.85 498.03,4862.21 -501.97,4862.21 -501.97,-196.85
Drill Drawing:
  lines w10: 462.6,0 462.6,0

## Dimensions
462.6,4665.36 to 462.6,0 on Mechanical 13
498.03,-196.85 to 498.03,4862.21 on Mechanical 13
462.6,0 to -472.44,0 on Mechanical 13
-501.97,-196.85 to 498.03,-196.85 on Mechanical 13